# Altium PCB ShieldBoard.PcbDoc
Units mil, origin at the board's own origin, x right, y up, seen from the top; angles counter-clockwise.
Board outline 2700 x 2100 mil, 2 copper layers (Top Layer, Bottom Layer), stack 62.8 mil thick; 15 components, 32 nets, 62 pads, 24 vias.
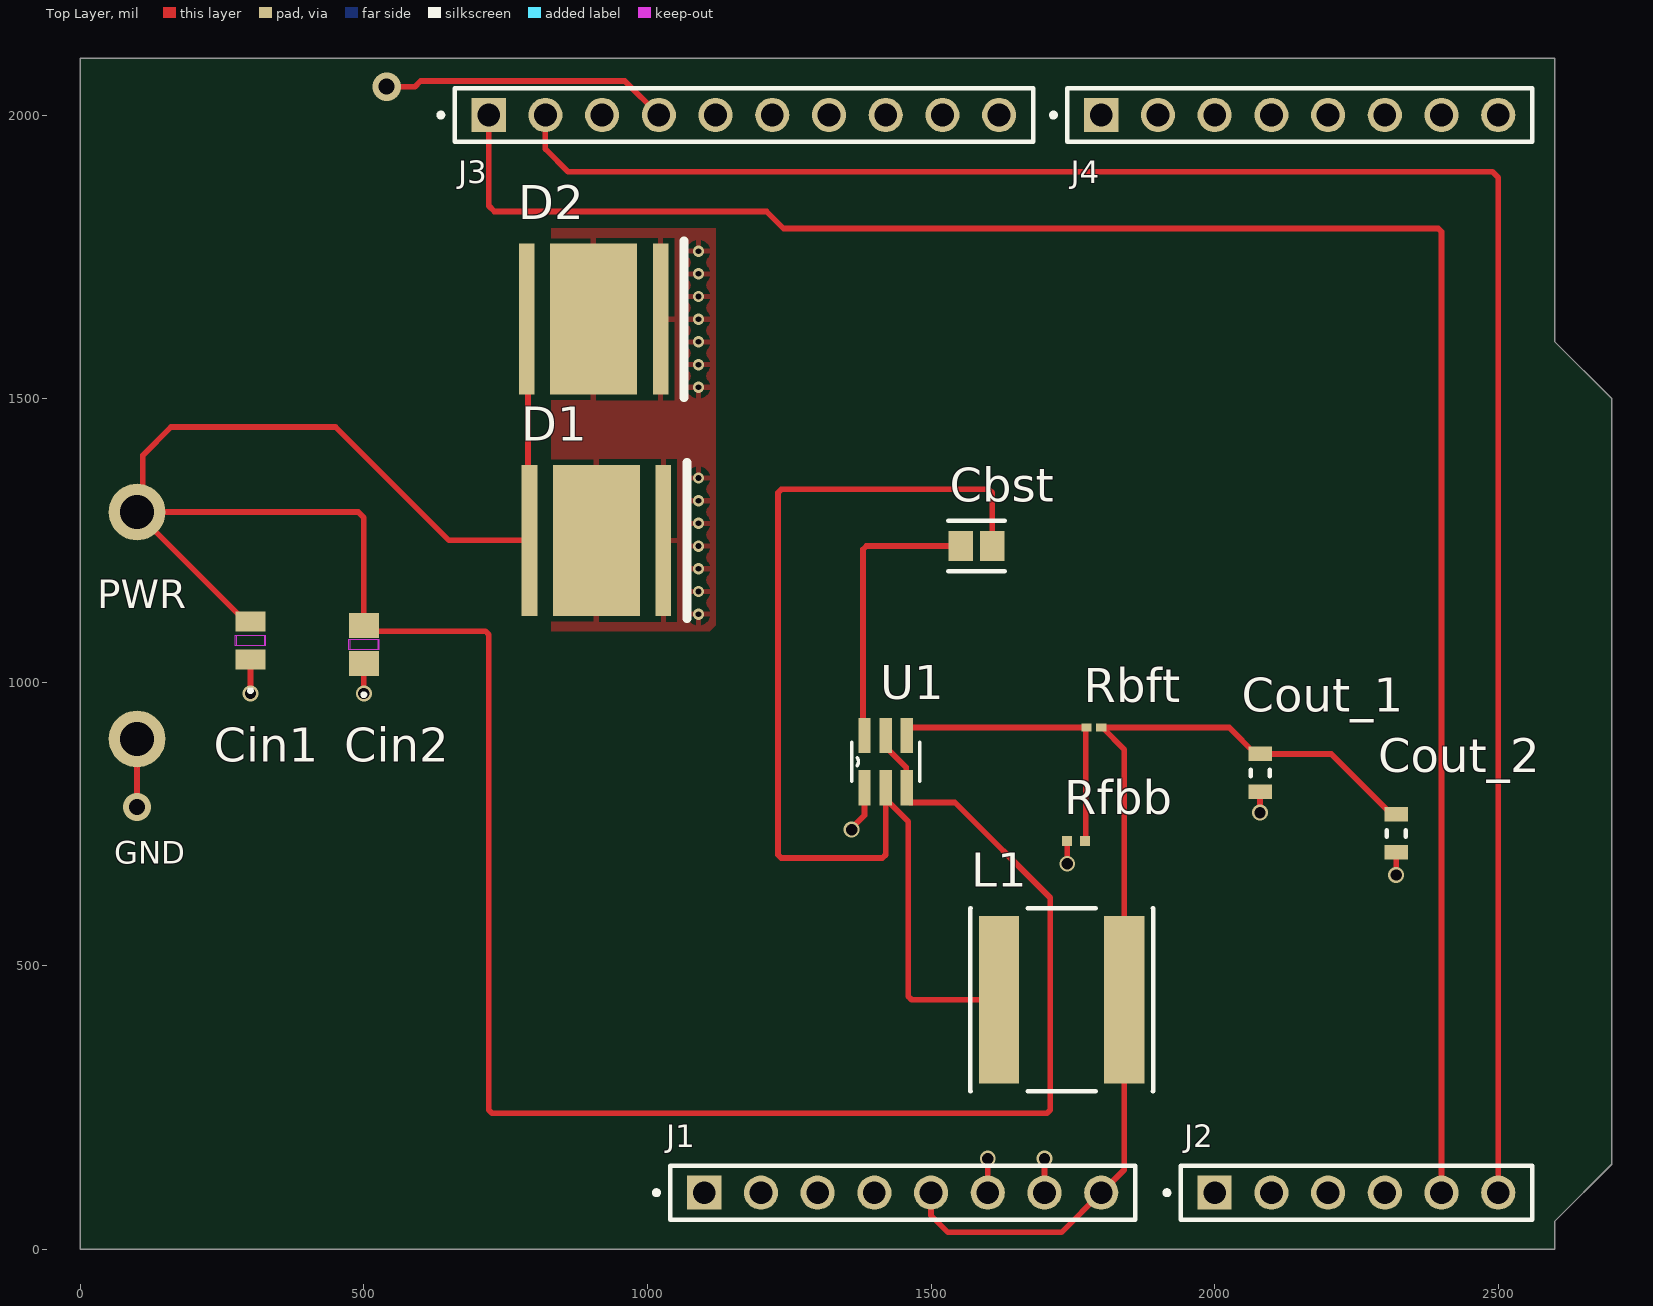
[diagram p0: Top Layer view]
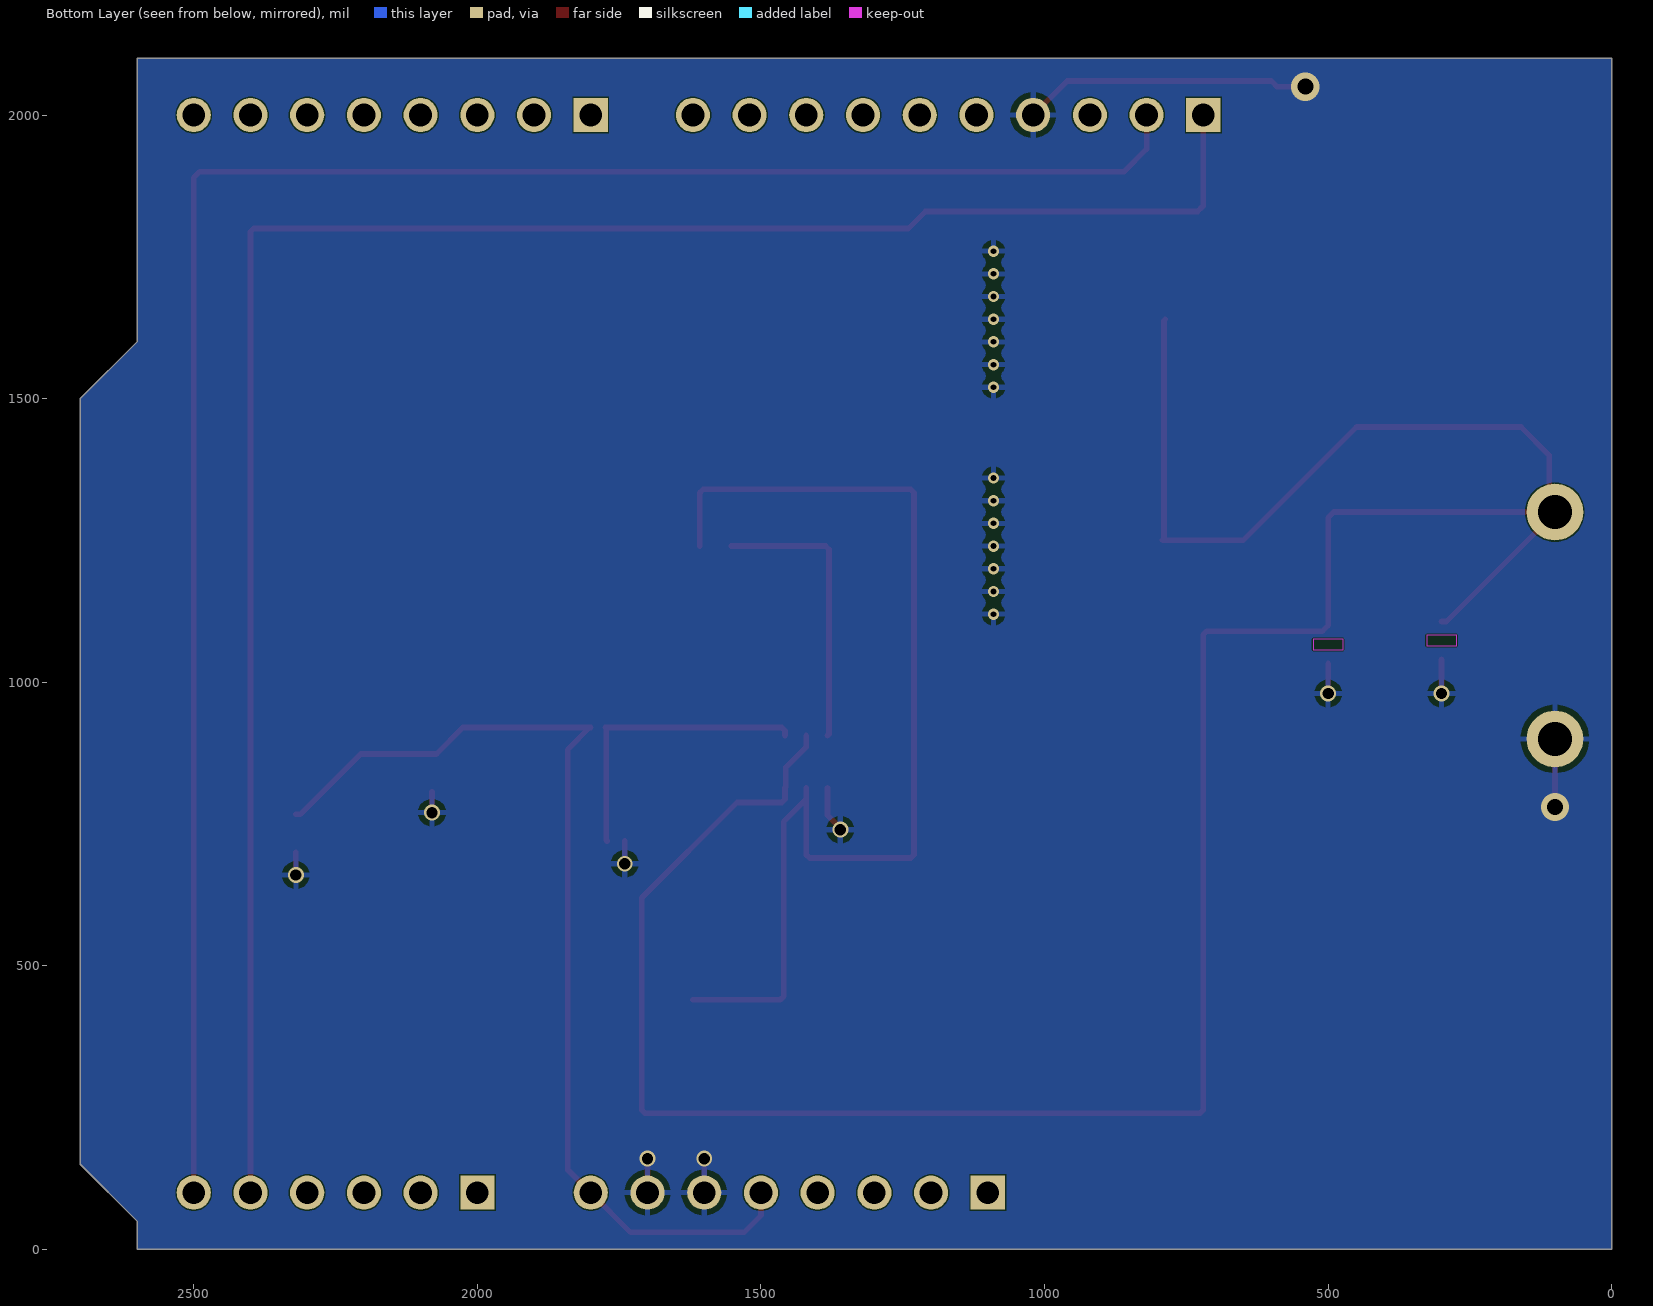
[diagram p1: Bottom Layer view, seen from below]

## Layer stack, top to bottom
Top Solder: solder mask 0.4, Solder Resist, Dk 3.5
Top Layer: signal copper 1.4
Dielectric 1: dielectric 60, FR-4, Dk 4.8
Bottom Layer: signal copper 1.4
Bottom Solder: solder mask 0.4, Solder Resist, Dk 3.5

## Board outline
2600,2100 2600,1600 2700,1500 2700,150 2600,50 2600,0 0,0 0,2100

## Design rules (kind name [scope] priority, off if disabled: settings)
Clearance [All] p1: gap=2 ignorepadtopadclearanceinfootprint=TRUE
MinimumSolderMaskSliver [All] p1: minsoldermaskwidth=5
PolygonConnect [All] p1: connectstyle=Relief reliefconductorwidth=10 reliefentries=4 polygonreliefangle="90 Angle" airgapwidth=10
RoutingVias [All] p1: holewidth=10 width=18 viastyle="Through Hole" minholewidth=6 minwidth=14 maxholewidth=28 maxwidth=50
SilkToSolderMaskClearance [IsPad] p1: minsilkscreentomaskgap=5 clearancetoexposedcopper=TRUE
SolderMaskExpansion [All] p1: expansion=0 istentingtop=FALSE
SupplyNets "Schematic Supply Nets_3" [InNet('+12')] p1: voltage=0.000
SupplyNets "Schematic Supply Nets_2" [InNet('+5')] p2: voltage=0.000
SupplyNets "Schematic Supply Nets_1" [InNet('0')] p3: voltage=0.000
SupplyNets "Schematic Supply Nets" [InNet('GND')] p4: voltage=0.000
UnRoutedNet [All] p1: checkbadconnections=TRUE
Width [All] p1: maxlimit=10 minlimit=10 preferedwidth=10
27 further rules are at their usual default settings.

## Components (designator, comment, footprint, x,y, rotation, side; value= is the part's Value field where it differs from the comment)
Cbst "08053C104KAT2A" FP-0805-L_2_01_0_2-W_1_25-IPC_C 1580,1240 r180 top
Cin1 "MSAST219LB5106KTNA01" CAP_MSAS21-9_TAY#1 300,1073.5 r90 top (schematic designator Cin_1)
Cin2 "MSAST219LB5106KTNA01" CAP_MSAS21-9_TAY#2 500,1066.5 r90 top (schematic designator Cin_2)
Cout_1 "C1608X5R1A226M080AC" CAPC1608X100X20ML10 2080,840 r90 top
Cout_2 "C1608X5R1A226M080AC" CAPC1608X100X20ML10 2320,733.46 r90 top
D1 "MKRAWT-00-0000-0D0HG235H" CREE-MK-R-2_V 910,1250 r0 top
D2 "MKRAWT-00-0000-0D0HG235H" CREE-MK-R-2_V 905,1640 r0 top
J1 "SSQ-108-03-X-S" SAMTEC_SSQ-108-03-X-S 1450,100 r180 top
J2 "SSQ-106-03-X-S" SAMTEC_SSQ-106-03-X-S 2250,100 r180 top
J3 "SSQ-110-03-X-S" SAMTEC_SSQ-110-03-X-S 1170,2000 r180 top
J4 "SSQ-108-03-X-S" SAMTEC_SSQ-108-03-X-S 2150,2000 r180 top
L1 "NRS8030T3R3MJGJ" FP-NRS8030-MFG 1730.24,440 r0 top
Rbft "CRCW020156K2FNED" RESC0603X28X15NL05T05 1787.2,920 r0 top
Rfbb "ERJ2RKF1002X" RESC1005X40X25LL05T05 1755.75,720 r0 top
U1 "TPS562200DDCR" DDC0006A 1420,860 r90 top

## Footprints (in the part's own frame and the unit in brackets; to place one, negate y for a bottom-side part, rotate by r counter-clockwise, add the part's x,y. Pads: shape width x height; smd on the part's side, far side on the other; paste and mask are expansions set on the pad)
CAP_MSAS21-9_TAY#1 [mil]
  rect 36x53 smd paste+0 mask+0: 1(-33.5,0) 2(33.5,0)
  Top Layer keep-out region: -9.5,-24.5 -9.5,24.5 9.5,24.5 9.5,-24.5
  Keep-Out Layer region: -9.5,-26.5 -9.5,26.5 9.5,26.5 9.5,-26.5
  silkscreen extent -91,-3 -86,3, body extent -41,-26 41,26, height 37
CAP_MSAS21-9_TAY#2 [mil]
  rect 44x53 smd paste+0 mask+0: 1(-33.5,0) 2(33.5,0)
  Top Layer keep-out region: -9.5,-24.5 -9.5,24.5 9.5,24.5 9.5,-24.5
  Keep-Out Layer region: -9.5,-26.5 -9.5,26.5 9.5,26.5 9.5,-26.5
  silkscreen extent -91,-3 -86,3, body extent -41,-26 41,26, height 37
CAPC1608X100X20ML10 [mm] "Chip Capacitor, 2-Leads, Body 1.70x0.90mm, IPC Low Density"
  rect 0.65x1.05 smd: 1(-0.85,0) 2(0.85,0)
  silkscreen extent -0.15,-0.43 0.15,0.43, body extent -0.85,-0.45 0.85,0.45, height 1
CREE-MK-R-2_V [mm] "SMD, 2-Leads, Body 7x7mm, Thermal Pad 3.9x6.76mm"
  rect 0.7x6.76 smd: 1(-3,0) 2(3,0)
  rect 3.9x6.76 smd: 3(0,0)
  silkscreen extent 4.05,-3.5 4.05,3.5, body extent -3.5,-3.5 3.5,3.5, height 4.1
DDC0006A [mil]
  rect 62x22 smd paste-4 mask+2: 1(-46,37.4) 2(-46,0) 3(-46,-37.4) 4(46,-37.4) 5(46,0) 6(46,37.4)
  silkscreen extent -35,-60 35,60
FP-0805-L_2_01_0_2-W_1_25-IPC_C [mil]
  rect 43.49x53.39 smd paste+0 mask+0: 1(-27.79,0) 2(27.79,0)
  silkscreen extent -50,-44 50,44, body extent -53,-32 53,32, height 10
FP-NRS8030-MFG [mm]
  rect 1.8x7.5 smd paste+0 mask+0: 1(-2.8,0) 2(2.8,0)
  silkscreen extent -4.1,-4.1 4.1,4.1, body extent -4.2,-4.2 4.2,4.2, height 0.25
RESC0603X28X15NL05T05 [mm] "Chip Resistor, 2-Leads, Body 0.60x0.30mm, IPC Medium Density"
  rect 0.45x0.35 smd: 1(-0.325,0) 2(0.325,0)
  body extent -0.33,-0.17 0.33,0.18, height 0.28
RESC1005X40X25LL05T05 [mm] "Chip Resistor, 2-Leads, Body 1.05x0.55mm, IPC High Density"
  rect 0.45x0.45 smd: 1(-0.4,0) 2(0.4,0)
  body extent -0.53,-0.28 0.53,0.28, height 0.4
SAMTEC_SSQ-106-03-X-S [mm]
  rect 1.53x1.53 / inner round 1.53 / far side rect 1.53x1.53 hole 1.02: 01(6.35,0)
  round 1.53 hole 1.02: 02(3.81,0) 03(1.27,0) 04(-1.27,0) 05(-3.81,0) 06(-6.35,0)
  silkscreen extent -7.88,-1.2 8.59,1.2
SAMTEC_SSQ-108-03-X-S [mm]
  rect 1.53x1.53 / inner round 1.53 / far side rect 1.53x1.53 hole 1.02: 01(8.89,0)
  round 1.53 hole 1.02: 02(6.35,0) 03(3.81,0) 04(1.27,0) 05(-1.27,0) 06(-3.81,0) 07(-6.35,0) 08(-8.89,0)
  silkscreen extent -10.42,-1.2 11.13,1.2
SAMTEC_SSQ-110-03-X-S [mm]
  rect 1.53x1.53 / inner round 1.53 / far side rect 1.53x1.53 hole 1.02: 01(11.43,0)
  round 1.53 hole 1.02: 02(8.89,0) 03(6.35,0) 04(3.81,0) 05(1.27,0) 06(-1.27,0) 07(-3.81,0) 08(-6.35,0) 09(-8.89,0) 10(-11.43,0)
  silkscreen extent -12.96,-1.2 13.67,1.2

## Part data
Cbst: library part CMP-2000-05014-2, "General Purpose Ceramic Capacitor, 0805, 100nF, 10%, X7R, 0.15, 25V", Capacitance=100nF, Case Code (Imperial)=0805, Case Code (Metric)=2012, Dielectric=X7R, Insulation Resistance=100GR, Max Operating Temperature=125°C, Min Operating Temperature=-55°C, Package Quantity=1, Tolerance=10%, Voltage=25V, Case/Package=0805, Construction=Flat, Contact Plating=Tin, Depth=1.25mm, Dissipation Factor=3%, Height=0.94mm, Lead Free="Lead Free", Length=2.01mm, Mount="Surface Mount", Number of Pins=2, Packaging="Tape and Reel", Radiation Hardening=No, REACH SVHC="No SVHC", RoHS Compliant=Yes, Series=-, Termination=SMD/SMT, Thickness=0.037inch, Voltage Rating=25V, Voltage Rating (DC)=25V, Width=0.049inch
Cin1 Cin2: "No Description Available", Manufacturer_Name="Taiyo Yuden", Copyright="Copyright (C) 2025 Ultra Librarian. All rights reserved.", Manufacturer_Part_Number=MSAST219LB5106KTNA01
Cout_1 Cout_2: library part CMP-2000-05441-1, "Chip Capacitor, 22 uF, +/- 20%, 10 V, -55 to 85 degC, 0603 (1608 Metric), RoHS, Tape and Reel", Capacitance=22µF, Manufacturer=TDK, Operating Temperature=-55degC~85degC, Package / Case=0603(1608Metric), Package Description="2-Pin Surface Mount Device, Body 1.6 x 0.8 mm", Package Reference=603, PCN Part Number=MLCCPartNumberChange30/Nov/2012, Ratings=-, Standard Package=1, Temperature Coefficient=X5R, Tolerance=±20%, Voltage - Rated=10V, Applications=GeneralPurpose, Category=Capacitors, Datasheet URL=http://download.siliconexpert.com/pdfs/2015/4/21/15/54/45/779/tdk_/manual/37024850441143360mlcc_commercial_general_en.pdf, Datasheet Version=Mar-15, Design Resources=20WNon-IsolatedBuckLEDDriverUsingPLLNK460KG, Family=CeramicCapacitors, Features=-, Height - Seated (Max)=-, Kits=445-9014-KIT-ND-KITMLCC100PF-22UF060310-50V, Lead Spacing=-, Lead Style=-, Manufacturer URL=http://www.tdk.com/, Mounting Type=SurfaceMount,MLCC, Online Catalog=CSeries,GeneralPurpose, Other Names=445-9077-1, Packaging=CutTape(CT), Product Training Modules=CSeriesGeneralApplicationsSEAT,CCV,andTVCLDesignToolsGuidetoReplacinganElectrolyticCapacitorwithanMLCC, RoHS Information=RoHSCertificate-MLCC, Series=C, Size / Dimension="0.063\"Lx0.031\"W(1.60mmx0.80mm)", Thickness (Max)="0.035\"(0.90mm)"
D1 D2: library part CMP-2100-00977-1, "LED, White, 12 V, 2-Pin SMD, RoHS, Tape and Reel"
J1 J4: library part CMP-002-00072-1, "SSQ - Samtec 2.54mm Square Tail Single Row Socket Strip 8.5mm Profile - Fast Stock", Case/Package=None, Check_prices=https://www.snapeda.com/parts/SSQ-108-03-T-S/Samtec/view-part/?ref=eda, Component Type=Standard, Design Item ID=SSQ-108-03-X-S, MF=Samtec, MP=SSQ-108-03-T-S, Pins=8, SnapEDA_Link=https://www.snapeda.com/parts/SSQ-108-03-T-S/Samtec/view-part/?ref=snap, Source=SSQ-108-03-X-S.SchLib
J2: library part CMP-002-00071-1, "SSQ - Samtec 2.54mm Square Tail Single Row Socket Strip 8.5mm Profile - Fast Stock", Case/Package=None, Check_prices=https://www.snapeda.com/parts/SSQ-106-03-T-S/Samtec+Inc./view-part/?ref=eda, Component Type=Standard, Design Item ID=SSQ-106-03-X-S, MF="Samtec Inc.", MP=SSQ-106-03-T-S, Pins=6, SnapEDA_Link=https://www.snapeda.com/parts/SSQ-106-03-T-S/Samtec+Inc./view-part/?ref=snap, Source=SSQ-106-03-X-S.SchLib
J3: library part CMP-002-00073-1, "10 Position Receptacle Connector 0.100 (2.54mm) Through Hole Gold", Case/Package=None, Check_prices=https://www.snapeda.com/parts/SSQ-110-03-F-S/Samtec+Inc./view-part/?ref=eda, Component Type=Standard, Design Item ID=SSQ-110-03-X-S, MF="Samtec Inc.", MP=SSQ-110-03-F-S, Pins=10, SnapEDA_Link=https://www.snapeda.com/parts/SSQ-110-03-F-S/Samtec+Inc./view-part/?ref=snap, Source=SSQ-110-03-X-S.SchLib
L1: library part CMP-14484-000405-1, "Inductor Power Shielded Wirewound 3.3uH 20% 100KHz Ferrite 4.2A 24.7mΩ DCR T/R", Case/Package=Nonstandard, Current Rating=4.3A, DC Resistance (DCR)=19mR, Inductance=3.3uH, Inductance Tolerance=20%, Max DC Current=4.2A, Max Operating Temperature=125°C, Min Operating Temperature=-25°C, Package Quantity=1000, Resistor Type=Wirewound, Self Resonant Frequency=50MHz, Test Frequency=100kHz, Core Material=Ferrite, Depth=8.2mm, Halogen Free="Halogen Free", Height=3mm, Height - Seated (Max)=0.118inch, Lead Free="Lead Free", Lead Pitch=5.6mm, Length=8mm, Mount="Surface Mount", Number of Pins=2, Packaging="Tape and Reel", Radiation Hardening=No, REACH SVHC="No SVHC", RMS Current (Irms)=4.3A, RoHS Compliant=Yes, Saturation Current=4.2A, Series=NRS, Shielding=Shielded, Termination=SMD/SMT, Tolerance=20%, Width=0.315inch
Rbft: library part CMP-2004-00723-1, Manufacturer="Vishay Dale", Part Number=CRCW020156K2FNED
Rfbb: library part CMP-2000-07588-1, "Chip Resistor, 10 KOhm, +/- 1%, 0.1 W, -55 to 155 degC, 0402 (1005 Metric), RoHS, Tape and Reel", Case Code (Imperial)=0402, Case Code (Metric)=1005, Manufacturer=Panasonic, Max Operating Temperature=155degC, Max Power Dissipation=100mW, Min Operating Temperature=-55degC, Package Description="2-Pin Surface Mount Device, Body 1 x 0.5 mm", Package Quantity=1, Package Reference=402, Resistance=10KOhm, Temperature Coefficient=100ppm\/degreesC, Tolerance=1%, Voltage Rating=50V, Case\/Package=0402, Composition=ThickFilm, Contact Plating=Tin, Datasheet URL=https://industrial.panasonic.com/cdbs/www-data/pdf/RDA0000/AOA0000C304.pdf, Datasheet Version=02/2017, Depth=0.5mm, Height=0.35mm, Lead Free=LeadFree, Length=1mm, Manufacturer URL=http://www.panasonic.com/, Military Standard=Not, Mount=SurfaceMount, Mounting Technology=SurfaceMount, Number of Pins=2, Number of Terminations=2, Packaging=TapeandReel, Power Rating=100mW, Radiation Hardening=No, REACH SVHC=NoSVHC, RoHSCompliant=True, Termination=SMD/SMT, Voltage Rating (DC)=50V, Width=0.02inch
U1: "17 V Input, 2A Synchronous Step-Down Regulator in SOT-23 with Advanced Eco-mode&trade; 6-SOT-23-THIN -40 to 125", Alternate_Manufacturer=None, CurrentDate="Not shown in title block", Manufacturer="Texas Instruments", PartNumber=TPS562200DDC, Address1="Not shown in title block", Address2="Not shown in title block", Address3="Not shown in title block", Address4="Not shown in title block", ApprovedBy="Not shown in title block", Author="Not shown in title block", CheckedBy="Not shown in title block", CompanyName="Not shown in title block", ComponentLink1Description="Datasheet Link", ComponentLink1URL=https://sps06.itg.ti.com/sites/KMS/crossdivteams/altium/docs/ComponentDatasheets/TPS562200_DS_v08_13_0909.docx, CompType=IC, Copyright="Copyright (C) 2025 Ultra Librarian. All rights reserved.", CurrentTime="Not shown in title block", Datasheet=https://www.ti.com/lit/gpn/tps562200, Date="Not shown in title block", DocumentFullPathAndName="Not shown in title block", DocumentName="Not shown in title block", DocumentNumber=1, Engineer="Not shown in title block", ImagePath="Not shown in title block", LatestRevisionDate=2014-02-20, Manufacturer_Name="Texas Instruments", Manufacturer_Part_Number=TPS562200DDCR, ModifiedDate="Not shown in title block", MountType=SMT, Organization="Not shown in title block", PackageReference=DDC0006A, Publisher="Texas Instruments", RefDes=Refdes, Revision="Use project parameter SCH_Rev", RoHS=Y, SheetNumber=1, SheetTotal=1, SymbolCreator=a0411947, SymbolVersion=2013-09-26, Time="Not shown in title block", Type=Type, U/M=EA

## Free pads (board coordinates)
  round 100 hole 60: 22(100,1300) 23(100,900)

## Via types
v1: diameter 20, hole 10, Top Layer to Bottom Layer, 14 vias
v2: diameter 28, hole 20, Top Layer to Bottom Layer, 8 vias
v3: diameter 50, hole 28, Top Layer to Bottom Layer, 2 vias

## Nets (pads, with @x,y where several pads share a name; then routed paths per layer and width w, separated by ;. In a path a pad name is that pad's centre, name@x,y a point inside that pad or via, vN(x,y) a via of type N, cw(c..) or ccw(c..) an arc to the next point about the centre after c; other vN are vias at no path point)
0: 
3.3V: J1.04
+5: Cout_1.2 Cout_2.2 J1.05 J1.08 L1.2 Rbft.2 | length 1819.5
  Top Layer w10: J1.05 1500,60 1530,30 1730,30 J1.08 1840.47,140.47 L1.2 1840.47,881.5 1801.97,920 Rbft.2 2025.59,920 2072.13,873.46 Cout_1.2 2205.59,873.46 2312.13,766.93 Cout_2.2
+12: Cin1.2 Cin2.2 D1.1 D2.1 pad.22 U1.3 U1.5 | length 5042.6
  Top Layer w10: Cin1.2 291.5,1107 100,1298.5 pad.22 ; D2.1 789.39,1637.5 789.39,1252.5 D1.1 650,1250 450,1450 160,1450 110,1400 110,1310 pad.22 ; U1.5 1420,886 1456,850 1456,815.4 U1.3 1457.4,794 1463.4,788 1542,788 1710,620 1710,245.86 1704.14,240 725.86,240 720,245.86 720,1084.14 714.14,1090 510,1090 Cin2.2 500,1290 490,1300 pad.22
A0: J2.01
A1: J2.02
A2: J2.03
A3: J2.04
A4: J2.05 J3.01 | length 3553.1
  Top Layer w10: J3.01 720,1840 730,1830 1210,1830 1240,1800 2394.14,1800 2400,1794.14 J2.05
A5: J2.06 J3.02 | length 3550.7
  Top Layer w10: J3.02 820,1940 860,1900 2490,1900 2500,1890 J2.06
AREF: J3.03
D0: J4.08
D1: J4.07
D2: J4.06
D3: J4.05
D4: J4.04
D5: J4.03
D6: J4.02
D7: J4.01
D8: J3.10
D9: J3.09
D10: J3.08
D11: J3.07
D12: J3.06
D13: J3.05
GND: Cin1.1 Cin2.1 Cout_1.1 Cout_2.1 D1.2 D1.3 D2.2 D2.3 J1.06 J1.07 J3.04 pad.23 Rfbb.1 U1.1 | length 1061.9
  Top Layer w10: v3(100,780) pad.23 ; v2(300,980) Cin1.1 ; v2(500,980) Cin2.1 ; v3(540,2050) 590,2050 600,2060 960,2060 J3.04 ; v2(1360,740) 1360,742.89 1382.6,765.48 U1.1 ; J1.06 v2(1600,160) ; J1.07 v2(1700,160) ; v2(1740,680) Rfbb.1 ; v2(2080,770) Cout_1.1 ; v2(2320,660) Cout_2.1
  other v1: 1090,1120 1090,1160 1090,1200 1090,1240 1090,1280 1090,1320 1090,1360 1090,1520 1090,1560 1090,1600 1090,1640 1090,1680 1090,1720 1090,1760
IOREF: J1.02
N-C: J1.01
NetCbst_1: Cbst.1 L1.1 U1.2 | length 1975.2
  Top Layer w10: Cbst.1 1607.79,1334.14 1601.93,1340 1235.86,1340 1230,1334.14 1230,695.86 1235.86,690 1414.14,690 1420,695.86 U1.2 1420,794 1460,754 1460,445.86 1465.86,440 L1.1
NetCbst_2: Cbst.2 U1.6 | length 503.9
  Top Layer w10: U1.6 1380,908.6 1380,1234.14 1385.86,1240 Cbst.2
NetRbft_1: Rbft.1 Rfbb.2 U1.4 | length 528.7
  Top Layer w10: U1.4 1457.4,914 1463.4,920 Rbft.1 1772.95,918.54 1772.95,721.46 Rfbb.2
RESET: J1.03

## Polygon pours and split planes (outlines as drawn)
GND on Top Layer "GND_L01_P002" (solid, pour order 2): 830,1090 1110,1090 1120,1100 1120,1800 830,1800
GND on Bottom Layer "GND_L02_P000" (solid, pour order 0): 0,0 2600,0 2600,50 2700,150 2700,1500 2600,1600 2600,2100 0,2100

## Silkscreen, mask and mechanical layers (free items; w line width, h text height)
Top Overlay:
  text "PWR" at 30,1130 h50
  text "GND" at 60,680 h40